# Altium PCB LED_64_V1.3.PcbDoc
Units mm, origin at the board's own origin, x right, y up, seen from the top; angles counter-clockwise.
Board outline 72 x 72 mm, 2 copper layers (Top Layer, Bottom Layer); 65 components, 17 nets, 150 pads, 54 vias.
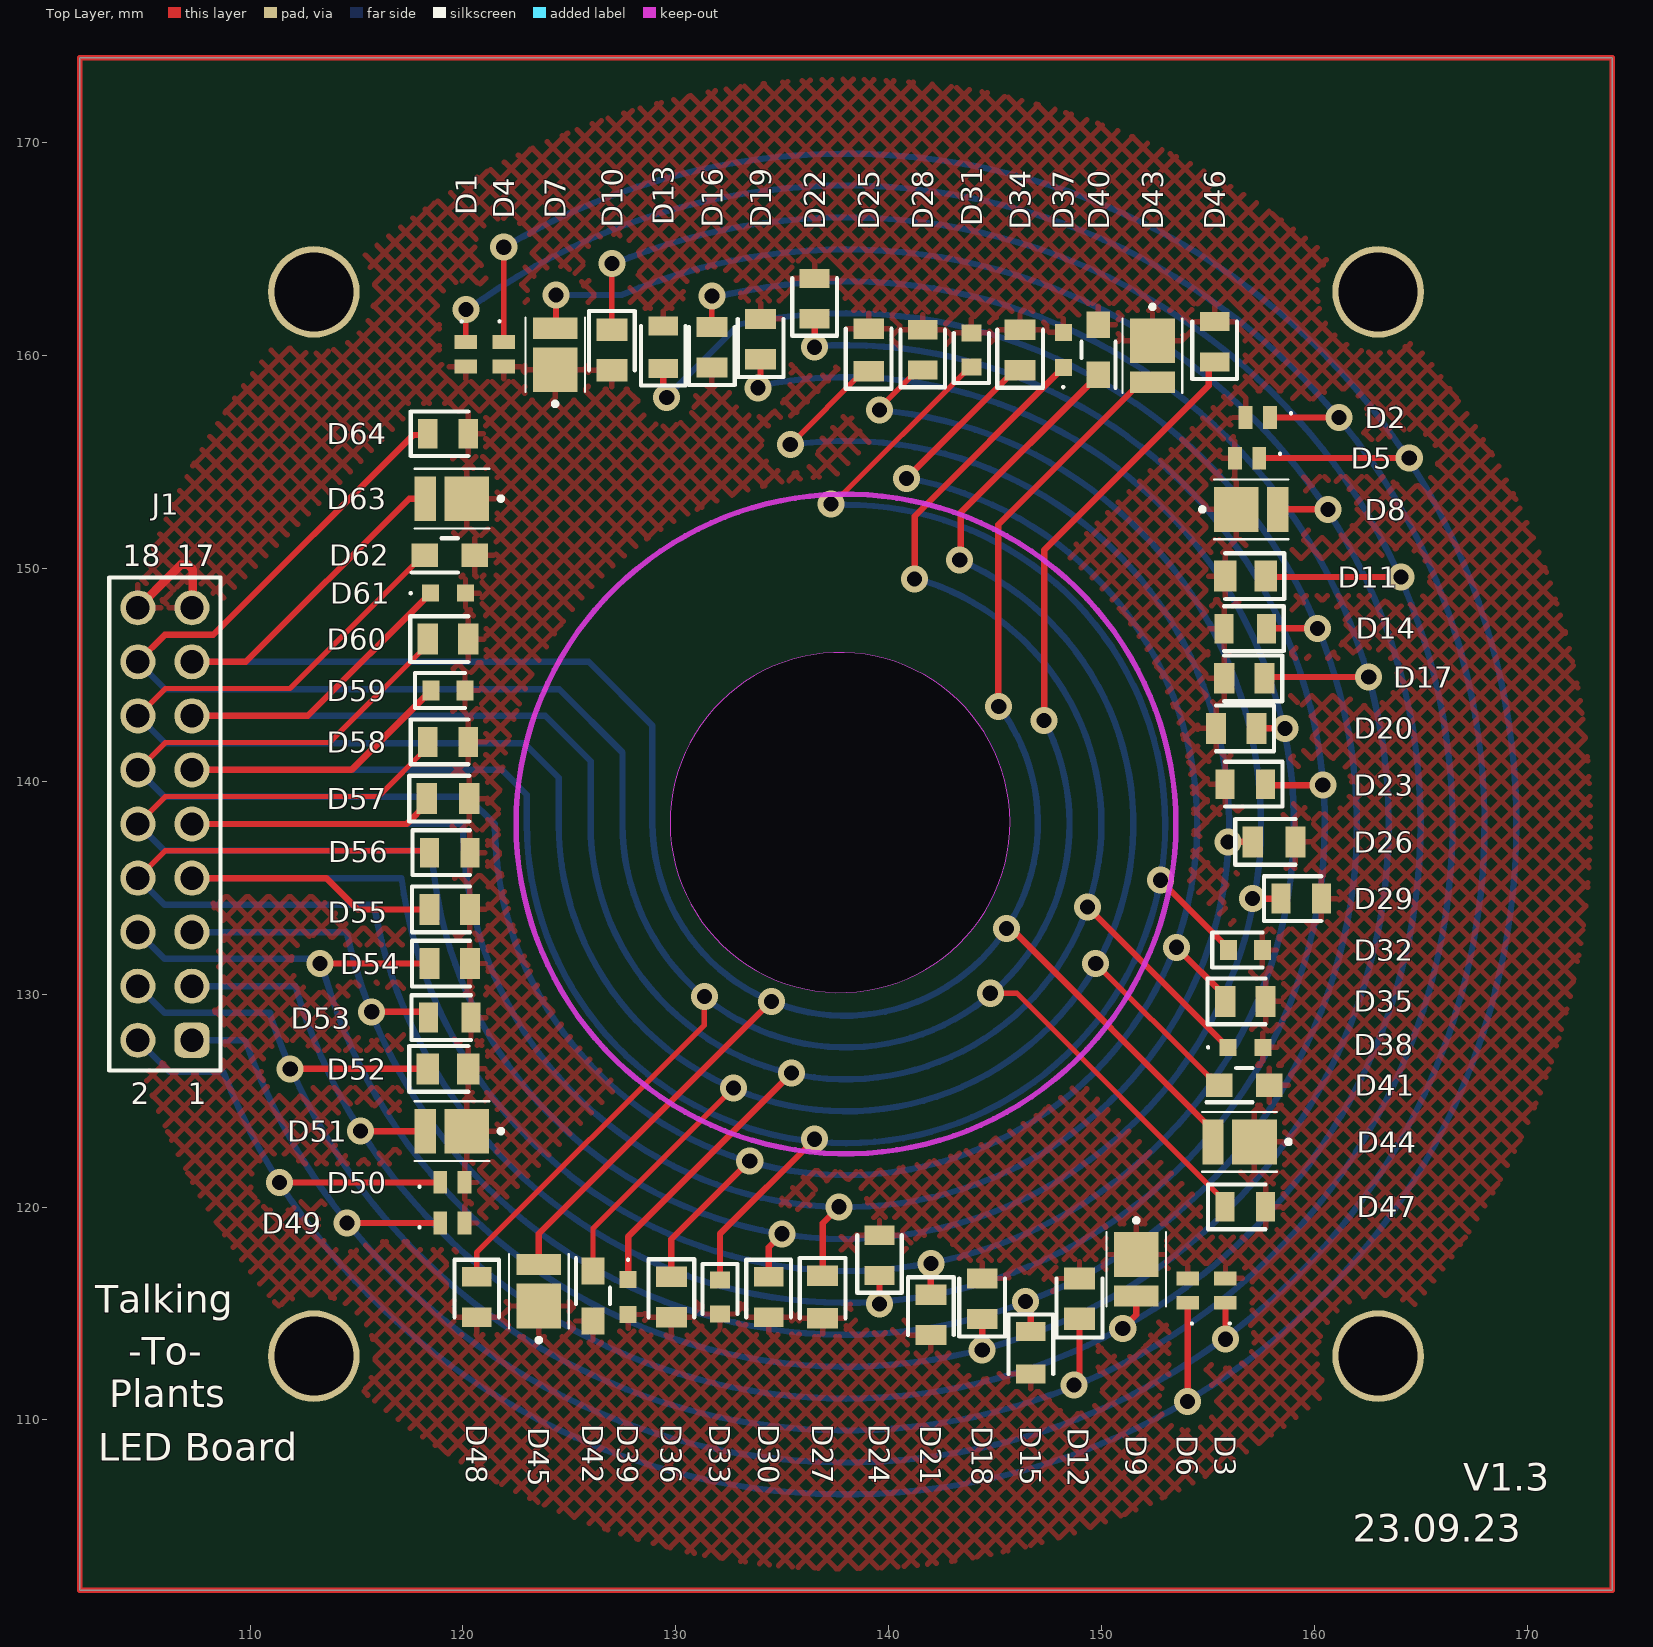
[diagram p0: Top Layer view]
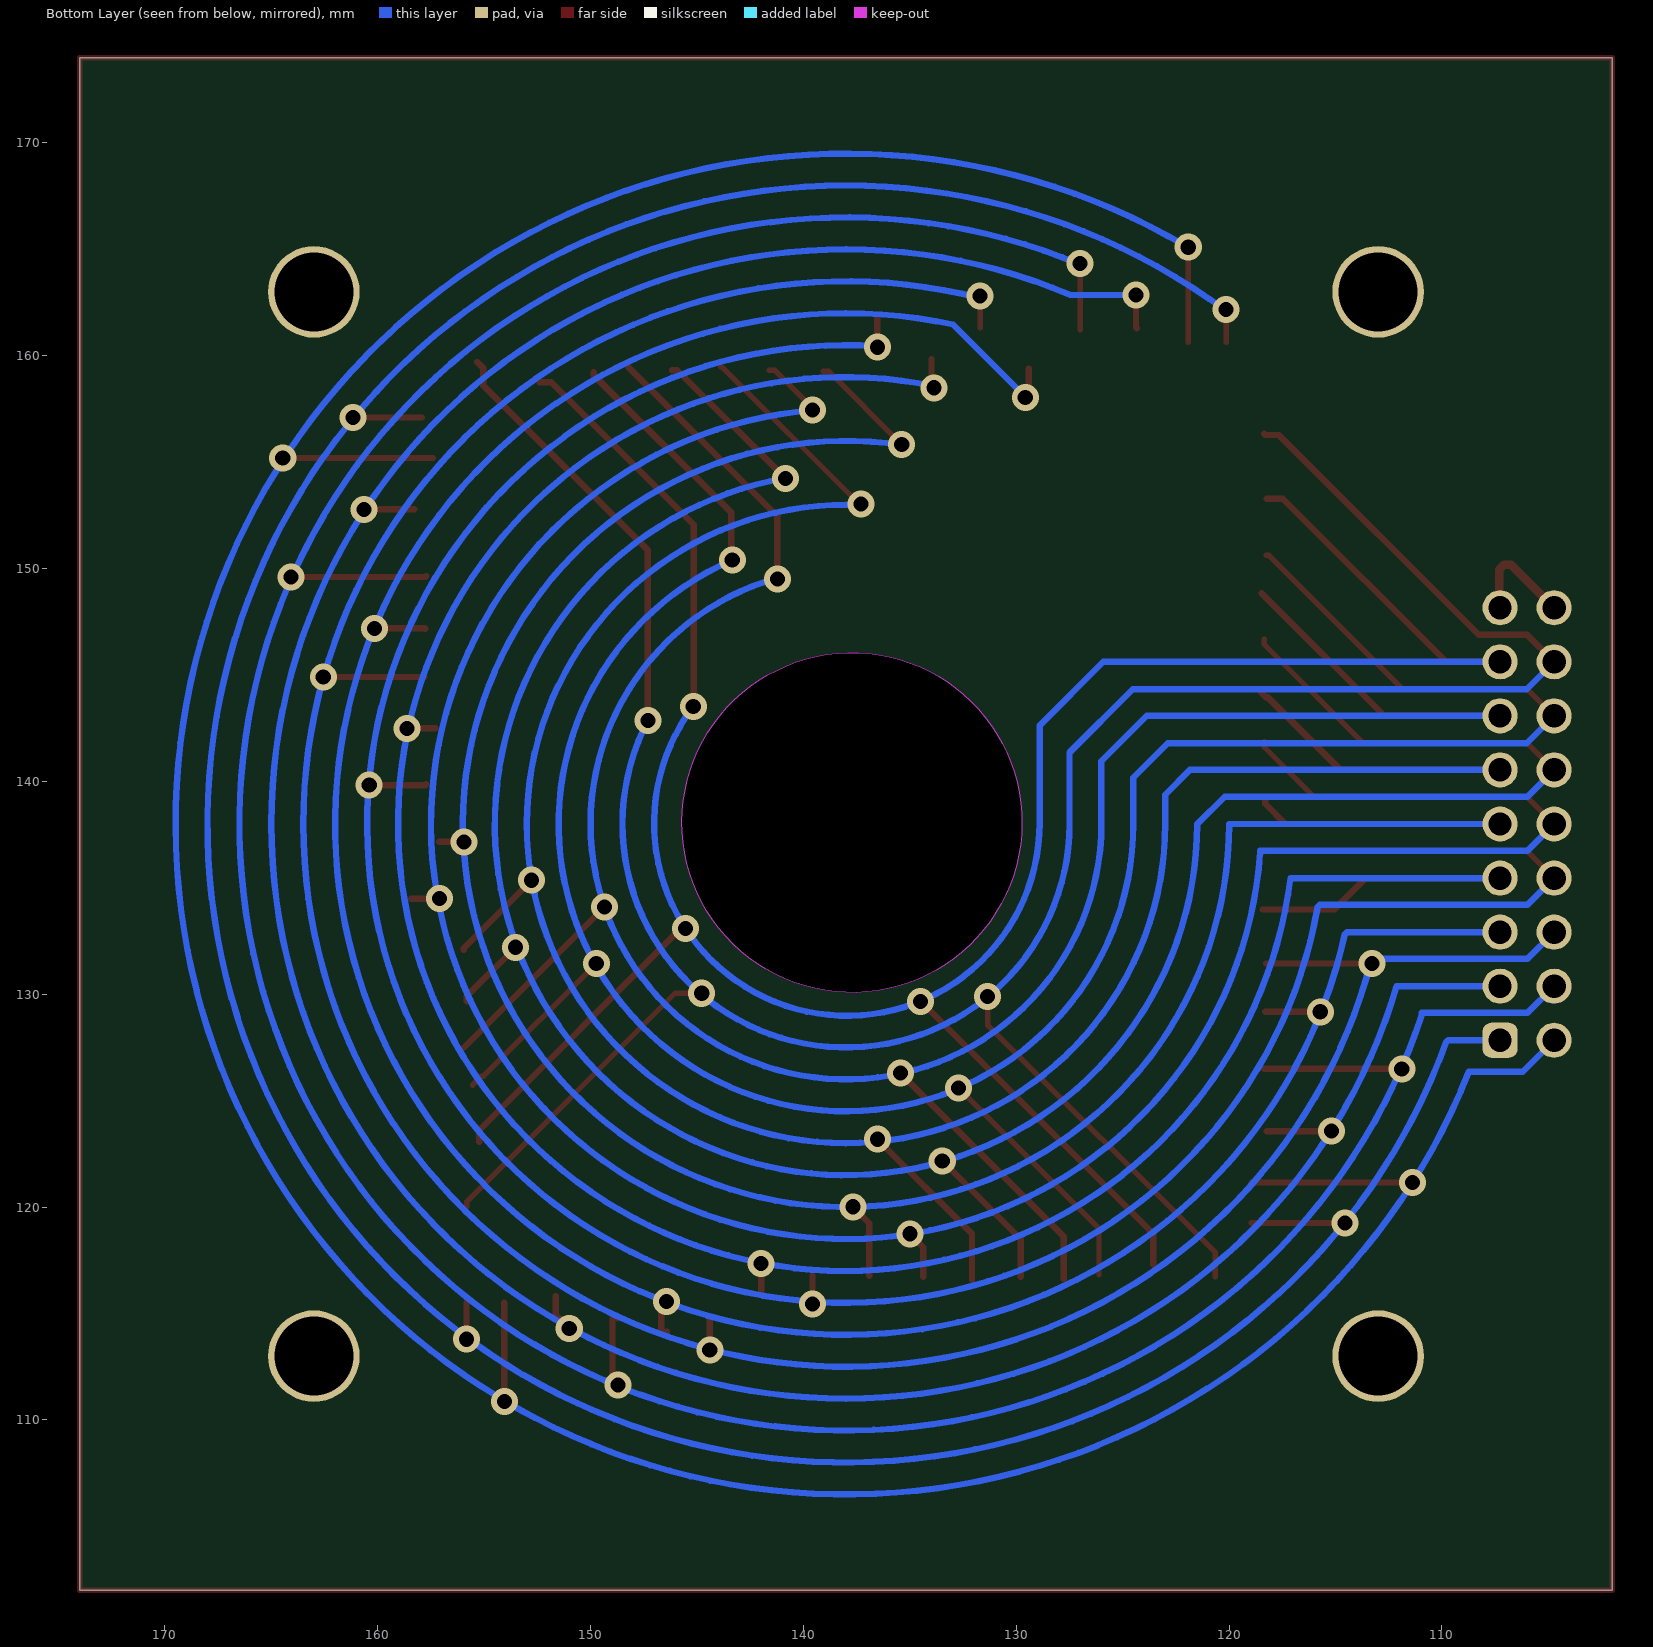
[diagram p1: Bottom Layer view, seen from below]

## Layer stack, top to bottom
Top Solder: solder mask 0.0102, Solder Resist, Dk 3.5
Top Layer: signal copper 0.0356
Dielectric 1: dielectric 0.32, FR-4, Dk 4.8
Bottom Layer: signal copper 0.0356
Bottom Solder: solder mask 0.0102, Solder Resist, Dk 3.5

## Board outline
102,102 174,102 174,174 102,174
cut-out: 137.922,146.05 ccw(c137.72,138.066) 137.519,130.081 ccw(c137.72,138.066)

## Design rules (kind name [scope] priority, off if disabled: settings)
Clearance [All] p1: gap=0.3 ignorepadtopadclearanceinfootprint=FALSE except(0.6: Arc-Fill Arc-Poly Arc-Region Track-Fill Track-Poly Track-Region SMDPad-Fill SMDPad-Poly SMDPad-Region THPad-Fill THPad-Poly THPad-Region Via-Fill Via-Poly Via-Region Fill-Fill Fill-Poly Fill-Region Poly-Poly Poly-Region Region-Region)
PolygonConnect [All] p1: connectstyle=Relief reliefconductorwidth=0.254 reliefentries=4 polygonreliefangle="90 Angle" airgapwidth=0.254
RoutingVias [All] p1: holewidth=0.711 width=1.27 viastyle="Through Hole" minholewidth=0.711 minwidth=1.27 maxholewidth=0.711 maxwidth=1.27
SolderMaskExpansion [All] p1: expansion=0.102 istentingtop=FALSE
Width [All] p1: maxlimit=1 minlimit=0.254 preferedwidth=0.254
30 further rules are at their usual default settings.

## Classes and differential pairs
component class LED_48: D1 D2 D3 D4 D5 D7 D8 D9 D10 D11 D13 D14 D15 D22 D23 D24 D25 D26 D27 D28 D29 D30 D31 D32 D33 D34 D35 D36 D37 D38 D39 D43 D44 D45 D46 D47 D48 J1 LED?

## Components (designator, comment, footprint, x,y, rotation, side; value= is the part's Value field where it differs from the comment)
D1 "ATS2012UV395" ATS2012UV395 120.142,160.066 r270 top
D2 "ATS2012UV395" ATS2012UV395 157.353,157.099 r180 top
D3 "ATS2012UV395" ATS2012UV395 155.829,116.078 r90 top
D4 "ATS2012UV395" ATS2012UV395 121.92,160.066 r270 top
D5 "ATS2012UV395" ATS2012UV395 156.845,155.194 r180 top
D6 "ATS2012UV395" ATS2012UV395 154.051,116.078 r90 top
D7 "150283DS73103" 150283DS73103 124.333,159.34 r90 top
D8 "150283DS73103" 150283DS73103 156.339,152.781 r0 top
D9 "150283DS73103" 150283DS73103 151.638,117.774 r270 top
D10 "599-0191-007F" LEDC2012X90N 127,160.274 r270 top
D11 "599-0191-007F" LEDC2012X90N 156.764,149.65 r180 top
D12 "599-0191-007F" LEDC2012X90N 148.971,115.697 r90 top
D13 "IN-S85ATG" LEDC2012X110N 129.413,160.401 r90 top
D14 "IN-S85ATG" LEDC2012X110N 156.764,147.176 r180 top
D15 "IN-S85ATG" LEDC2012X110N 146.685,113.157 r270 top
D16 "APT2012LSECK/J3-PRV" LEDC2012X75N 131.699,160.401 r90 top (schematic designator D34)
D17 "APT2012LSECK/J3-PRV" LEDC2012X75N 156.718,144.847 r180 top (schematic designator D34)
D18 "APT2012LSECK/J3-PRV" LEDC2012X75N 144.399,115.697 r90 top (schematic designator D34)
D19 "APT2012LSECK/J3-PRV" LEDC2012X75N 133.985,160.782 r90 top (schematic designator D34)
D20 "APT2012LSECK/J3-PRV" LEDC2012X75N 156.337,142.494 r180 top (schematic designator D34)
D21 "APT2012LSECK/J3-PRV" LEDC2012X75N 141.986,114.935 r270 top (schematic designator D34)
D22 "150080VS75000" LEDC2012X80N 136.525,162.687 r90 top
D23 "150080VS75000" LEDC2012X80N 156.764,139.872 r180 top
D24 "150080VS75000" LEDC2012X80N 139.573,117.729 r90 top
D25 "CMD17-21VYC/TR8" LEDC2012X120N 139.068,160.274 r90 top
D26 "CMD17-21VYC/TR8" LEDC2012X120N 158.115,137.16 r0 top
D27 "CMD17-21VYC/TR8" LEDC2012X120N 136.903,115.778 r270 top
D28 "150080YS75000" LEDC2012X80N 141.605,160.274 r90 top
D29 "150080YS75000" LEDC2012X80N 159.385,134.493 r0 top
D30 "150080YS75000" LEDC2012X80N 134.366,115.778 r270 top
D31 "APT1608SECK-AMT" LEDC1608X85N 143.891,160.274 r90 top
D32 "APT1608SECK-AMT" LEDC1608X85N 156.764,132.08 r0 top
D33 "APT1608SECK-AMT" LEDC1608X85N 132.08,115.778 r270 top
D34 "APT2012LSECK/J3-PRV" LEDC2012X75N 146.177,160.274 r90 top
D35 "APT2012LSECK/J3-PRV" LEDC2012X75N 156.764,129.667 r0 top
D36 "APT2012LSECK/J3-PRV" LEDC2012X75N 129.794,115.778 r270 top
D37 "APT1608SEC/J3-AMT" APT1608SECJ3AMT 148.209,160.274 r90 top
D38 "APT1608SEC/J3-AMT" APT1608SECJ3AMT 156.764,127.508 r0 top
D39 "APT1608SEC/J3-AMT" APT1608SECJ3AMT 127.762,115.778 r270 top
D40 "Comment" LXF0805SRD-TR 149.86,160.274 r270 top
D41 "Comment" LXF0805SRD-TR 156.718,125.73 r180 top
D42 "Comment" LXF0805SRD-TR 126.111,115.824 r90 top
D43 "150283FS73103" 150283DS73103 152.4,160.699 r270 top
D44 "150283FS73103" 150283DS73103 157.189,123.063 r180 top
D45 "150283FS73103" 150283DS73103 123.571,115.353 r90 top
D46 "APT2012SF4C-PRV" LEDC2012X85N 155.321,160.655 r90 top
D47 "APT2012SF4C-PRV" LEDC2012X85N 156.764,120.015 r0 top
D48 "APT2012SF4C-PRV" LEDC2012X85N 120.65,115.778 r270 top
D49 "ATS2012UV395" ATS2012UV395 119.507,119.253 r0 top (schematic designator D1)
D50 "ATS2012UV395" ATS2012UV395 119.507,121.158 r0 top (schematic designator D4)
D51 "150283DS73103" 150283DS73103 120.187,123.571 r180 top (schematic designator D7)
D52 "599-0191-007F" LEDC2012X90N 119.299,126.492 r0 top (schematic designator D10)
D53 "IN-S85ATG" LEDC2012X110N 119.38,128.905 r0 top (schematic designator D13)
D54 "APT2012LSECK/J3-PRV" LEDC2012X75N 119.38,131.445 r0 top (schematic designator D34)
D55 "APT2012LSECK/J3-PRV" LEDC2012X75N 119.38,133.985 r0 top (schematic designator D34)
D56 "150080VS75000" LEDC2012X80N 119.38,136.652 r0 top (schematic designator D22)
D57 "CMD17-21VYC/TR8" LEDC2012X120N 119.299,139.195 r0 top (schematic designator D25)
D58 "150080YS75000" LEDC2012X80N 119.299,141.859 r0 top (schematic designator D28)
D59 "APT1608SECK-AMT" LEDC1608X85N 119.299,144.272 r0 top (schematic designator D31)
D60 "APT2012LSECK/J3-PRV" LEDC2012X75N 119.299,146.685 r0 top (schematic designator D34)
D61 "APT1608SEC/J3-AMT" APT1608SECJ3AMT 119.299,148.844 r0 top (schematic designator D37)
D62 "Comment" LXF0805SRD-TR 119.38,150.622 r180 top
D63 "150283FS73103" 150283DS73103 120.187,153.289 r180 top (schematic designator D43)
D64 "APT2012SF4C-PRV" LEDC2012X85N 119.299,156.337 r0 top (schematic designator D46)
J1 "61301821121" 61301821121 106,138 r90 top

## Footprints (in the part's own frame and the unit in brackets; to place one, negate y for a bottom-side part, rotate by r counter-clockwise, add the part's x,y. Pads: shape width x height; smd on the part's side, far side on the other; paste and mask are expansions set on the pad)
150283DS73103 [mm]
  rect 2.1x2.1 smd: 1(0,0)
  rect 1x2.1 smd: 2(1.95,0)
  silkscreen extent -1.7,-1.4 2.45,1.4, body extent -1.05,-1.4 2.45,1.4, height 0.95
61301821121 [mm] "Pin Header, pitch 2.54 mm, THT, Vertical, dual row, 18p"
  rrect50% 1.65x1.65 hole 1.1: 1(-10.16,-1.27)
  round 1.65 hole 1.1: 2(-10.16,1.27) 3(-7.62,-1.27) 4(-7.62,1.27) 5(-5.08,-1.27) 6(-5.08,1.27) 7(-2.54,-1.27) 8(-2.54,1.27) 9(0,-1.27) 10(0,1.27) 11(2.54,-1.27) 12(2.54,1.27) 13(5.08,-1.27) 14(5.08,1.27) 15(7.62,-1.27) 16(7.62,1.27) 17(10.16,-1.27) 18(10.16,1.27)
  silkscreen extent -11.58,-2.62 11.58,2.62, body extent -11.43,-2.54 11.43,2.54, height 8.59
APT1608SECJ3AMT [mm]
  rect 0.8x0.8 smd: 1(-0.825,0) 2(0.825,0)
  silkscreen extent -1.8,-0.05 -1.7,0.05
ATS2012UV395 [mm]
  rect 0.65x1.06 smd: 1(-0.575,0) 2(0.575,0)
  silkscreen extent -1.6,-0.25 -1.5,-0.15
LEDC1608X85N [mm]
  rect 0.8x0.95 smd: 1(-0.8,0) 2(0.8,0)
  silkscreen extent -1.55,-0.82 0.8,0.82
LEDC2012X75N [mm]
  rect 0.95x1.45 smd: 1(-0.95,0) 2(0.95,0)
  silkscreen extent -1.78,-1.07 0.95,1.07
LEDC2012X80N [mm]
  rect 0.9x1.4 smd: 1(-0.95,0) 2(0.95,0)
  silkscreen extent -1.75,-1.05 0.95,1.05
LEDC2012X85N [mm]
  rect 0.9x1.4 smd: 1(-0.95,0) 2(0.95,0)
  silkscreen extent -1.75,-1.05 0.95,1.05
LEDC2012X90N [mm]
  rect 1.05x1.45 smd: 1(-0.95,0) 2(0.95,0)
  silkscreen extent -1.83,-1.07 0.95,1.08
LEDC2012X110N [mm]
  rect 0.9x1.4 smd: 1(-1,0) 2(1,0)
  silkscreen extent -1.8,-1.05 1,1.05
LEDC2012X120N [mm]
  rect 0.95x1.45 smd: 1(-1,0) 2(1,0)
  silkscreen extent -1.83,-1.07 1,1.07
LXF0805SRD-TR [mm] "RED LED"
  rect 1.25x1.1 smd: 1(1.175,0) 2(-1.175,0)
  silkscreen extent -0.38,-0.8 1.78,0.8

## Part data
D1 D2 D3 D4 D5 D6 D49 D50: "Standard LEDs - SMD 2x1.2mm UV SMD", Manufacturer_Name=Kingbright, Mouser Part Number=604-ATS2012UV395, Arrow Part Number=ATS2012UV395, Arrow Price/Stock=https://www.arrow.com/en/products/ats2012uv395/kingbright, Datasheet Link=https://www.arrow.com/en/products/ats2012uv395/kingbright, Geometry.Height=1mm, Manufacturer_Part_Number=ATS2012UV395, Mouser Price/Stock=https://www.mouser.co.uk/ProductDetail/Kingbright/ATS2012UV395?qs=%252BEew9%252B0nqrCgwxEBSEvg7Q%3D%3D
D7 D8 D9 D51: "LED", Manufacturer_Name="Wurth Elektronik", Mouser Part Number=710-150283DS73103, Datasheet Link=https://www.mouser.jp/datasheet/2/445/150283DS73103-1838914.pdf, Height=0.85mm, Manufacturer_Part_Number=150283DS73103, Mouser Price/Stock=https://www.mouser.co.uk/ProductDetail/Wurth-Elektronik/150283DS73103/?qs=GedFDFLaBXFC8uVfOF%252Bhgw%3D%3D
D10 D11 D12 D52: "Standard LEDs - SMD SMD 0805 BLUE", Manufacturer_Name=Dialight, Mouser Part Number=645-599-0191-007F, Datasheet Link=https://componentsearchengine.com/Datasheets/1/599-0191-007F.pdf, Geometry.Height=0.9mm, Manufacturer_Part_Number=599-0191-007F, Mouser Price/Stock=https://www.mouser.co.uk/ProductDetail/Dialight/599-0191-007F?qs=gTYE2QTfZfTbWzs5Ohdbbg%3D%3D
D13 D14 D15 D53: "Standard LEDs - SMD True Green LED", Manufacturer_Name=Inolux, Mouser Part Number=743-IN-S85ATG, Datasheet Link=http://www.inolux-corp.com/datasheet/SMDLED/Mono%20Color%20Top%20View/IN-S85AT%20Series_V1.1.pdf, Geometry.Height=1.1mm, Manufacturer_Part_Number=IN-S85ATG, Mouser Price/Stock=https://www.mouser.co.uk/ProductDetail/Inolux/IN-S85ATG?qs=fAHHVMwC%252BbhWv0EIR%2FKEPw%3D%3D
D16 D17 D18 D19 D20 D21 D34 D35 D36 D54 D55 D60: "Standard LEDs - SMD 2.0X1.2MM LOW CRNT", Arrow Part Number=ATS2012UV395, Manufacturer_Name=Kingbright, Mouser Part Number=604-ATS2012UV395, Arrow Price/Stock=https://www.arrow.com/en/products/ats2012uv395/kingbright, Datasheet Link=https://www.arrow.com/en/products/ats2012uv395/kingbright, Geometry.Height=1mm, Manufacturer_Part_Number=ATS2012UV395, Mouser Price/Stock=https://www.mouser.co.uk/ProductDetail/Kingbright/ATS2012UV395?qs=%252BEew9%252B0nqrCgwxEBSEvg7Q%3D%3D
D22 D23 D24 D56: "Standard LEDs - SMD WL-SMCW SMDMono TpVw Waterclr 0805 BrtGrn", Manufacturer_Name=Dialight, Manufacturer_Part_Number=599-0191-007F, Mouser Part Number=645-599-0191-007F, Datasheet Link=https://componentsearchengine.com/Datasheets/1/599-0191-007F.pdf, Geometry.Height=0.9mm, Mouser Price/Stock=https://www.mouser.co.uk/ProductDetail/Dialight/599-0191-007F?qs=gTYE2QTfZfTbWzs5Ohdbbg%3D%3D
D25 D26 D27 D57: "Standard LEDs - SMD YELLOW WATER CLEAR", Manufacturer_Name=Dialight, Manufacturer_Part_Number=599-0191-007F, Mouser Part Number=645-599-0191-007F, Datasheet Link=https://componentsearchengine.com/Datasheets/1/599-0191-007F.pdf, Geometry.Height=0.9mm, Mouser Price/Stock=https://www.mouser.co.uk/ProductDetail/Dialight/599-0191-007F?qs=gTYE2QTfZfTbWzs5Ohdbbg%3D%3D
D28 D29 D30 D58: library part SML-LX0805UWC-TR, "Standard LEDs - SMD WL-SMCW SMDMono TpVw Waterclr 0805 Yellow", Manufacturer_Name=Dialight, Manufacturer_Part_Number=599-0191-007F, Mouser Part Number=645-599-0191-007F, Datasheet Link=https://componentsearchengine.com/Datasheets/1/599-0191-007F.pdf, Geometry.Height=0.9mm, Mouser Price/Stock=https://www.mouser.co.uk/ProductDetail/Dialight/599-0191-007F?qs=gTYE2QTfZfTbWzs5Ohdbbg%3D%3D
D31 D32 D33 D59: "Standard LEDs - SMD 1.6x0.8mm Orange", Manufacturer_Name=Dialight, Manufacturer_Part_Number=599-0191-007F, Mouser Part Number=645-599-0191-007F, Datasheet Link=https://componentsearchengine.com/Datasheets/1/599-0191-007F.pdf, Geometry.Height=0.9mm, Mouser Price/Stock=https://www.mouser.co.uk/ProductDetail/Dialight/599-0191-007F?qs=gTYE2QTfZfTbWzs5Ohdbbg%3D%3D
D37 D38 D39 D61: "Standard LEDs - SMD 1.6x0.8mm Red", Arrow Part Number=ATS2012UV395, Manufacturer_Name=Kingbright, Mouser Part Number=604-ATS2012UV395, Arrow Price/Stock=https://www.arrow.com/en/products/ats2012uv395/kingbright, Datasheet Link=https://www.arrow.com/en/products/ats2012uv395/kingbright, Geometry.Height=1mm, Manufacturer_Part_Number=ATS2012UV395, Mouser Price/Stock=https://www.mouser.co.uk/ProductDetail/Kingbright/ATS2012UV395?qs=%252BEew9%252B0nqrCgwxEBSEvg7Q%3D%3D
D43 D44 D45 D63: library part 150283DS73103, "LED", Manufacturer_Name="Wurth Elektronik", Mouser Part Number=710-150283DS73103, Datasheet Link=https://www.mouser.jp/datasheet/2/445/150283DS73103-1838914.pdf, Height=0.85mm, Manufacturer_Part_Number=150283DS73103, Mouser Price/Stock=https://www.mouser.co.uk/ProductDetail/Wurth-Elektronik/150283DS73103/?qs=GedFDFLaBXFC8uVfOF%252Bhgw%3D%3D
D46 D47 D48 D64: "Infrared Emitters IR 880nm 120 deg Water Clear 1 mW/sr", Arrow Part Number=ATS2012UV395, Manufacturer_Name=Kingbright, Mouser Part Number=604-ATS2012UV395, Arrow Price/Stock=https://www.arrow.com/en/products/ats2012uv395/kingbright, Datasheet Link=https://www.arrow.com/en/products/ats2012uv395/kingbright, Geometry.Height=1mm, Manufacturer_Part_Number=ATS2012UV395, Mouser Price/Stock=https://www.mouser.co.uk/ProductDetail/Kingbright/ATS2012UV395?qs=%252BEew9%252B0nqrCgwxEBSEvg7Q%3D%3D
J1: library part CMP-1502-01101-2, Color=Black, Contact Resistance=20mΩ, Current Rating=3A, Operating Supply Voltage=250V, Connector Type="Male Pin", Contact Material=Copper, Contact Mating Length=5.9944mm, Contact Plating=Gold, Gender=Male, Lead Pitch=2.54mm, Mount="Through Hole", NexarPartId=32855553, Number of contacts=18, Number of Pins=18, Number of Positions=18, Number Of Rows=2, Orientation=Vertical, Packaging=Bulk, Pitch=2.54mm, REACH SVHC=Unknown, RoHS=Compliant, Row Spacing=2.54mm, Termination=Solder

## Free pads (board coordinates)
  round 4.3 hole 3.7: 7(113,113) 7(113,163) 7(163,113) 7(163,163)

## Via types
v1: diameter 1.27, hole 0.711, Top Layer to Bottom Layer, 54 vias

## Nets (pads, with @x,y where several pads share a name; then routed paths per layer and width w, separated by ;. In a path a pad name is that pad's centre, name@x,y a point inside that pad or via, vN(x,y) a via of type N, cw(c..) or ccw(c..) an arc to the next point about the centre after c; other vN are vias at no path point)
0-: D1.1 D2.1 D3.1 D49.1 J1.1 | length 163.4
  Top Layer w0.254: D1.1 v1(120.142,162.179)
  Top Layer w0.3: v1(114.554,119.253) D49.1 ; v1(155.829,113.792) D3.1 ; D2.1 v1(161.163,157.099)
  Bottom Layer w0.3: J1.1 109.712,127.84 109.807,127.745 ccw(c138,138) v1@120.177,162.132
1-: D4.1 D5.1 D6.1 D50.1 J1.2 | length 181.6
  Top Layer w0.254: D4.1 v1(121.92,165.1)
  Top Layer w0.3: v1(111.379,121.158) D50.1 ; v1(154.051,110.871) D6.1 ; D5.1 v1(164.465,155.194)
  Bottom Layer w0.3: J1.2 106.205,126.365 108.743,126.365 ; 108.743,126.327 ccw(c138,138) v1@121.981,165.123
2-: D7.2 D8.2 D9.2 D51.2 J1.3 | length 147
  Top Layer w0.3: v1(115.189,123.571) D51.2 ; D7.2 124.373,161.33 v1(124.373,162.854) ; v1(151.003,114.3) 151.638,114.935 D9.2 ; D8.2 v1(160.655,152.781)
  Bottom Layer w0.3: J1.3 112.132,130.38 ccw(c138,137.954) 138,111 ccw(c138,138) 127.45,162.854 v1(124.373,162.854)
3-: D10.1 D11.1 D12.1 D52.1 J1.4 | length 162.5
  Top Layer w0.254: D10.1 v1(127,164.338)
  Top Layer w0.3: v1(111.887,126.492) D52.1 ; v1(148.717,111.633) 148.971,111.887 D12.1 ; D12.1@148.717,114.784 D12.1@148.761,114.828 ; D11.1 157.758,149.606 v1(164.084,149.606)
  Bottom Layer w0.3: J1.4 105.982,129.128 110.94,129.128 ; 110.94,129.055 ccw(c138,138) v1@126.971,164.28
3v3: D1.2 D2.2 D3.2 D4.2 D5.2 D6.2 D7.1 D8.1 D9.1 D10.2 D11.2 D12.2 D13.2 D14.2 D15.2 D16.1 D17.2 D18.2 D19.2 D20.2 D21.2 D22.2 D23.2 D24.2 D25.2 D26.2 D27.2 D28.2 D29.2 D30.2 D31.2 D32.2 D33.2 D34.2 D35.2 D36.2 D37.2 D38.2 D39.2 D40.2 D41.2 D42.2 D43.1 D44.1 D45.1 D46.2 D47.2 D48.2 D49.2 D50.2 D51.1 D52.2 D53.2 D54.2 D55.2 D56.2 D57.2 D58.2 D59.2 D60.2 D61.2 D62.2 D63.1 D64.2 J1.17 J1.18 | length 5.3
  Top Layer w0.4: J1.18 106.749,150.179 107.081,150.179 107.315,149.945 107.315,148.205 J1.17
4-: D13.1 D14.1 D15.1 D53.1 J1.5 | length 133
  Top Layer w0.3: v1(115.714,129.176) D53.1@118.299,129.176 ; D13.1 129.413,158.204 v1(129.576,158.042) ; v1(146.431,115.57) 146.685,115.316 D15.1 ; D14.1 157.781,147.193 v1(160.147,147.193)
  Bottom Layer w0.3: J1.5 114.463,132.92 114.566,132.817 ccw(c138,138) 132.959,161.465 129.576,158.081 v1(129.576,158.042)
5-: D16.2 D17.1 D18.1 D54.1 J1.6 | length 141.8
  Top Layer w0.254: D16.2@131.699,161.324 v1(131.699,162.814)
  Top Layer w0.3: v1(113.284,131.445) D54.1@118.249,131.445 ; v1(144.399,113.284) D18.1@144.399,114.728 ; D17.1@157.814,144.907 v1(162.56,144.907)
  Bottom Layer w0.3: J1.6 105.982,131.668 113.235,131.668 113.321,131.582 ccw(c138,138) v1@131.694,162.708
6-: D19.1 D20.1 D21.1 D55.1 J1.7 | length 126.5
  Top Layer w0.3: J1.7 113.587,135.46 115.062,133.985 D55.1 ; v1(133.858,158.496) 133.858,158.623 133.985,158.75 D19.1 ; D21.1 v1(141.986,117.348) ; D20.1 v1(158.623,142.494)
  Bottom Layer w0.3: J1.7 117.117,135.46 ccw(c138.049,138.097) 138.049,117 ccw(c138.049,138) 145.893,157.48 ccw(c138.049,138) v1@133.89,158.584
7-: D22.1 D23.1 D24.1 D56.1 J1.8 | length 134.9
  Top Layer w0.25: J1.8 106.018,136.748 106.33,136.748
  Top Layer w0.254: 106.33,136.748 118.334,136.748 D56.1
  Top Layer w0.3: v1(136.525,160.401) D22.1 ; v1(139.573,115.443) D24.1 ; D23.1 157.759,139.827 v1(160.401,139.827)
  Bottom Layer w0.3: J1.8 105.982,134.208 115.744,134.208 115.838,134.114 ccw(c138,138) v1@136.496,160.45
8-: D25.1 D26.1 D27.1 D57.1 J1.9 | length 121.7
  Top Layer w0.254: v1(135.382,155.829) 135.382,155.838 138.818,159.274 D25.1
  Top Layer w0.3: J1.9 117.354,138 118.299,138.945 D57.1 ; D27.1 136.903,117.853 136.906,117.856 136.906,119.243 137.668,120.005 v1(137.668,120.015) ; v1(155.956,137.16) D26.1
  Bottom Layer w0.3: J1.9 120,138 ccw(c138,138) v1@135.367,155.806
9-: D28.1 D29.1 D30.1 D58.1 J1.10 | length 125.2
  Top Layer w0.25: J1.10 106.018,139.288 116.028,139.288
  Top Layer w0.254: 116.028,139.288 118.349,141.609 D58.1 ; v1@139.573,157.353 139.573,157.542 141.355,159.324 D28.1
  Top Layer w0.3: D30.1 134.366,118.11 v1(135.001,118.745) ; v1(157.099,134.493) D29.1
  Bottom Layer w0.3: J1.10 105.982,136.748 118.546,136.748 ; 118.546,136.656 ccw(c138,138) v1@139.58,157.436
  other v1: 139.573,157.447
10-: D31.1 D32.1 D33.1 D59.1 J1.11 | length 124.2
  Top Layer w0.254: v1(137.287,153.035) 137.377,153.035 143.816,159.474 D31.1
  Top Layer w0.3: J1.11 114.767,140.54 118.174,143.947 118.249,143.947 118.499,144.197 D59.1 ; D33.1 132.08,118.745 v1(136.525,123.19) ; v1@152.781,135.382 152.781,135.338 155.964,132.155 D32.1
  Bottom Layer w0.3: J1.11 121.842,140.54 123,139.382 123,138 ccw(c138,138) v1@137.289,152.983
  other v1: 152.781,135.36
11-: D34.1 D35.1 D36.1 D60.1 J1.12 | length 127.1
  Top Layer w0.25: 106.018,141.828 106.265,141.828
  Top Layer w0.254: J1.12 106.018,141.828 ; 106.265,141.828 113.742,141.828 118.349,146.435 D60.1
  Top Layer w0.3: D36.1 129.794,118.491 v1(133.477,122.174) ; v1@140.843,154.178 v1(140.843,154.24) 145.927,159.324 D34.1 ; v1@153.416,132.207 v1(153.524,132.207) 155.814,129.917 D35.1
  Bottom Layer w0.3: J1.12 105.982,139.288 120.212,139.288 121.5,138 ccw(c138,138) v1@140.834,154.255
12-: D37.1 D38.1 D39.1 D61.1 J1.13 | length 124.5
  Top Layer w0.3: J1.13 112.71,143.08 D61.1 ; D39.1 127.762,118.618 v1(135.445,126.301) ; v1(141.222,149.511) 141.222,152.462 D37.1 ; v1@149.352,134.112 v1(149.352,134.095) D38.1
  Bottom Layer w0.3: J1.13 123.874,143.08 126,140.954 126,138.002 ccw(c138,138) v1@141.235,149.556
13-: D40.1 D41.1 D42.1 D62.1 J1.14 | length 129.1
  Top Layer w0.25: J1.14 106.018,144.368 111.87,144.368
  Top Layer w0.254: 111.87,144.368 118.124,150.622 D62.1@118.249,150.622 ; D42.1@126.111,116.828 126.111,118.999 v1(132.715,125.603) ; v1(149.733,131.445) 155.025,126.153 155.12,126.153 D41.1
  Top Layer w0.3: v1@143.383,150.37 143.383,152.622 D40.1 D40.1@149.86,159.224
  Bottom Layer w0.3: J1.14 106.018,141.792 122.876,141.792 124.5,140.168 124.5,138.002 ccw(c138,138) v1(143.341,150.398)
14-: D43.2 D44.2 D45.2 D63.2 J1.15 | length 125.5
  Top Layer w0.3: J1.15 109.805,145.62 117.474,153.289 D63.2 ; D45.2 123.571,118.745 v1(134.493,129.667) ; v1@145.161,143.52 145.161,152.06 151.85,158.749 D43.2 ; v1(145.542,133.096) 145.756,133.096 155.239,123.613 D44.2
  Bottom Layer w0.3: J1.15 125.906,145.62 128.905,142.621 128.905,138.053 ccw(c137.961,138.045) v1(145.174,143.52) ; 147.017,138.047 ccw(c146.717,138.046) 147.016,138.052
15-: D46.1 D47.1 D48.1 D64.1 J1.16 | length 137.1
  Top Layer w0.254: D48.1 120.65,117.856 131.347,128.553 v1(131.347,129.892) ; v1(144.78,130.048) 146.031,130.048 155.814,120.265 D47.1
  Top Layer w0.3: J1.16 106,146.89 106.737,146.89 106.742,146.885 108.277,146.885 117.667,156.275 118.287,156.275 D64.1 ; v1@147.32,142.867 147.32,150.876 155.044,158.6 155.044,159.428 D46.1
  Bottom Layer w0.3: J1.16 106.018,144.332 124.527,144.332 127.5,141.359 127.5,138 ccw(c138,138) v1(147.304,142.867)
copper on no net: | length 288
  Top Layer w0.254: 102,102 102,174 174,174 174,102 102,102

## Polygon pours and split planes (outlines as drawn)
3v3 on Top Layer "NONET_L-01_P-001" (hatched 45Degree grid 0.7 track 0.25, remove dead copper, pour order 1): 102.997,138 ccw(c137.985,138) 172.974,138 ccw(c137.986,138)

## Keep-outs
Top Layer:
  circle w0.254: c138,138 r15.5

## Silkscreen, mask and mechanical layers (free items; w line width, h text height)
Top Overlay:
  text "Talking" at 102.728,115.037 h1.3
  text "-To-" at 104.267,112.604 h1.3
  text "Plants" at 103.378,110.604 h1.3
  text "LED Board" at 102.87,108.077 h1.3
  text "V1.3" at 167.005,106.68 h1.3
  text "23.09.23" at 161.798,104.267 h1.3
Mechanical 1 (used for board outline):
  lines w0.254: 129.576,158.042 129.594,158.042
Mechanical 2:
  circle w0.254: c138,138 r35
  lines w0.254: 114.935,114.808 114.935,158.242 ; 115.57,108.458 159.385,108.458 ; 163.195,117.094 163.195,158.369 ; 119.3,115.825 156.7,115.825 156.7,160.175 119.3,160.175 119.3,115.825

## Text inside footprints (layer, text, board x,y; h text height)
J1: Top Overlay "1" at 107.061,124.841 h1.02; Top Overlay "2" at 104.394,124.841 h1.02; Top Overlay "17" at 106.553,150.114 h1.02; Top Overlay "18" at 104.013,150.114 h1.02